# Altium PCB TRUMAN_PCB.PcbDoc (part 3 of 5)
Units mil, origin at the board's own origin, x right, y up, seen from the top; angles counter-clockwise.
Board outline 8050 x 5340 mil, 2 copper layers (Top Layer, Bottom Layer); 272 components, 210 nets, 840 pads, 280 vias.
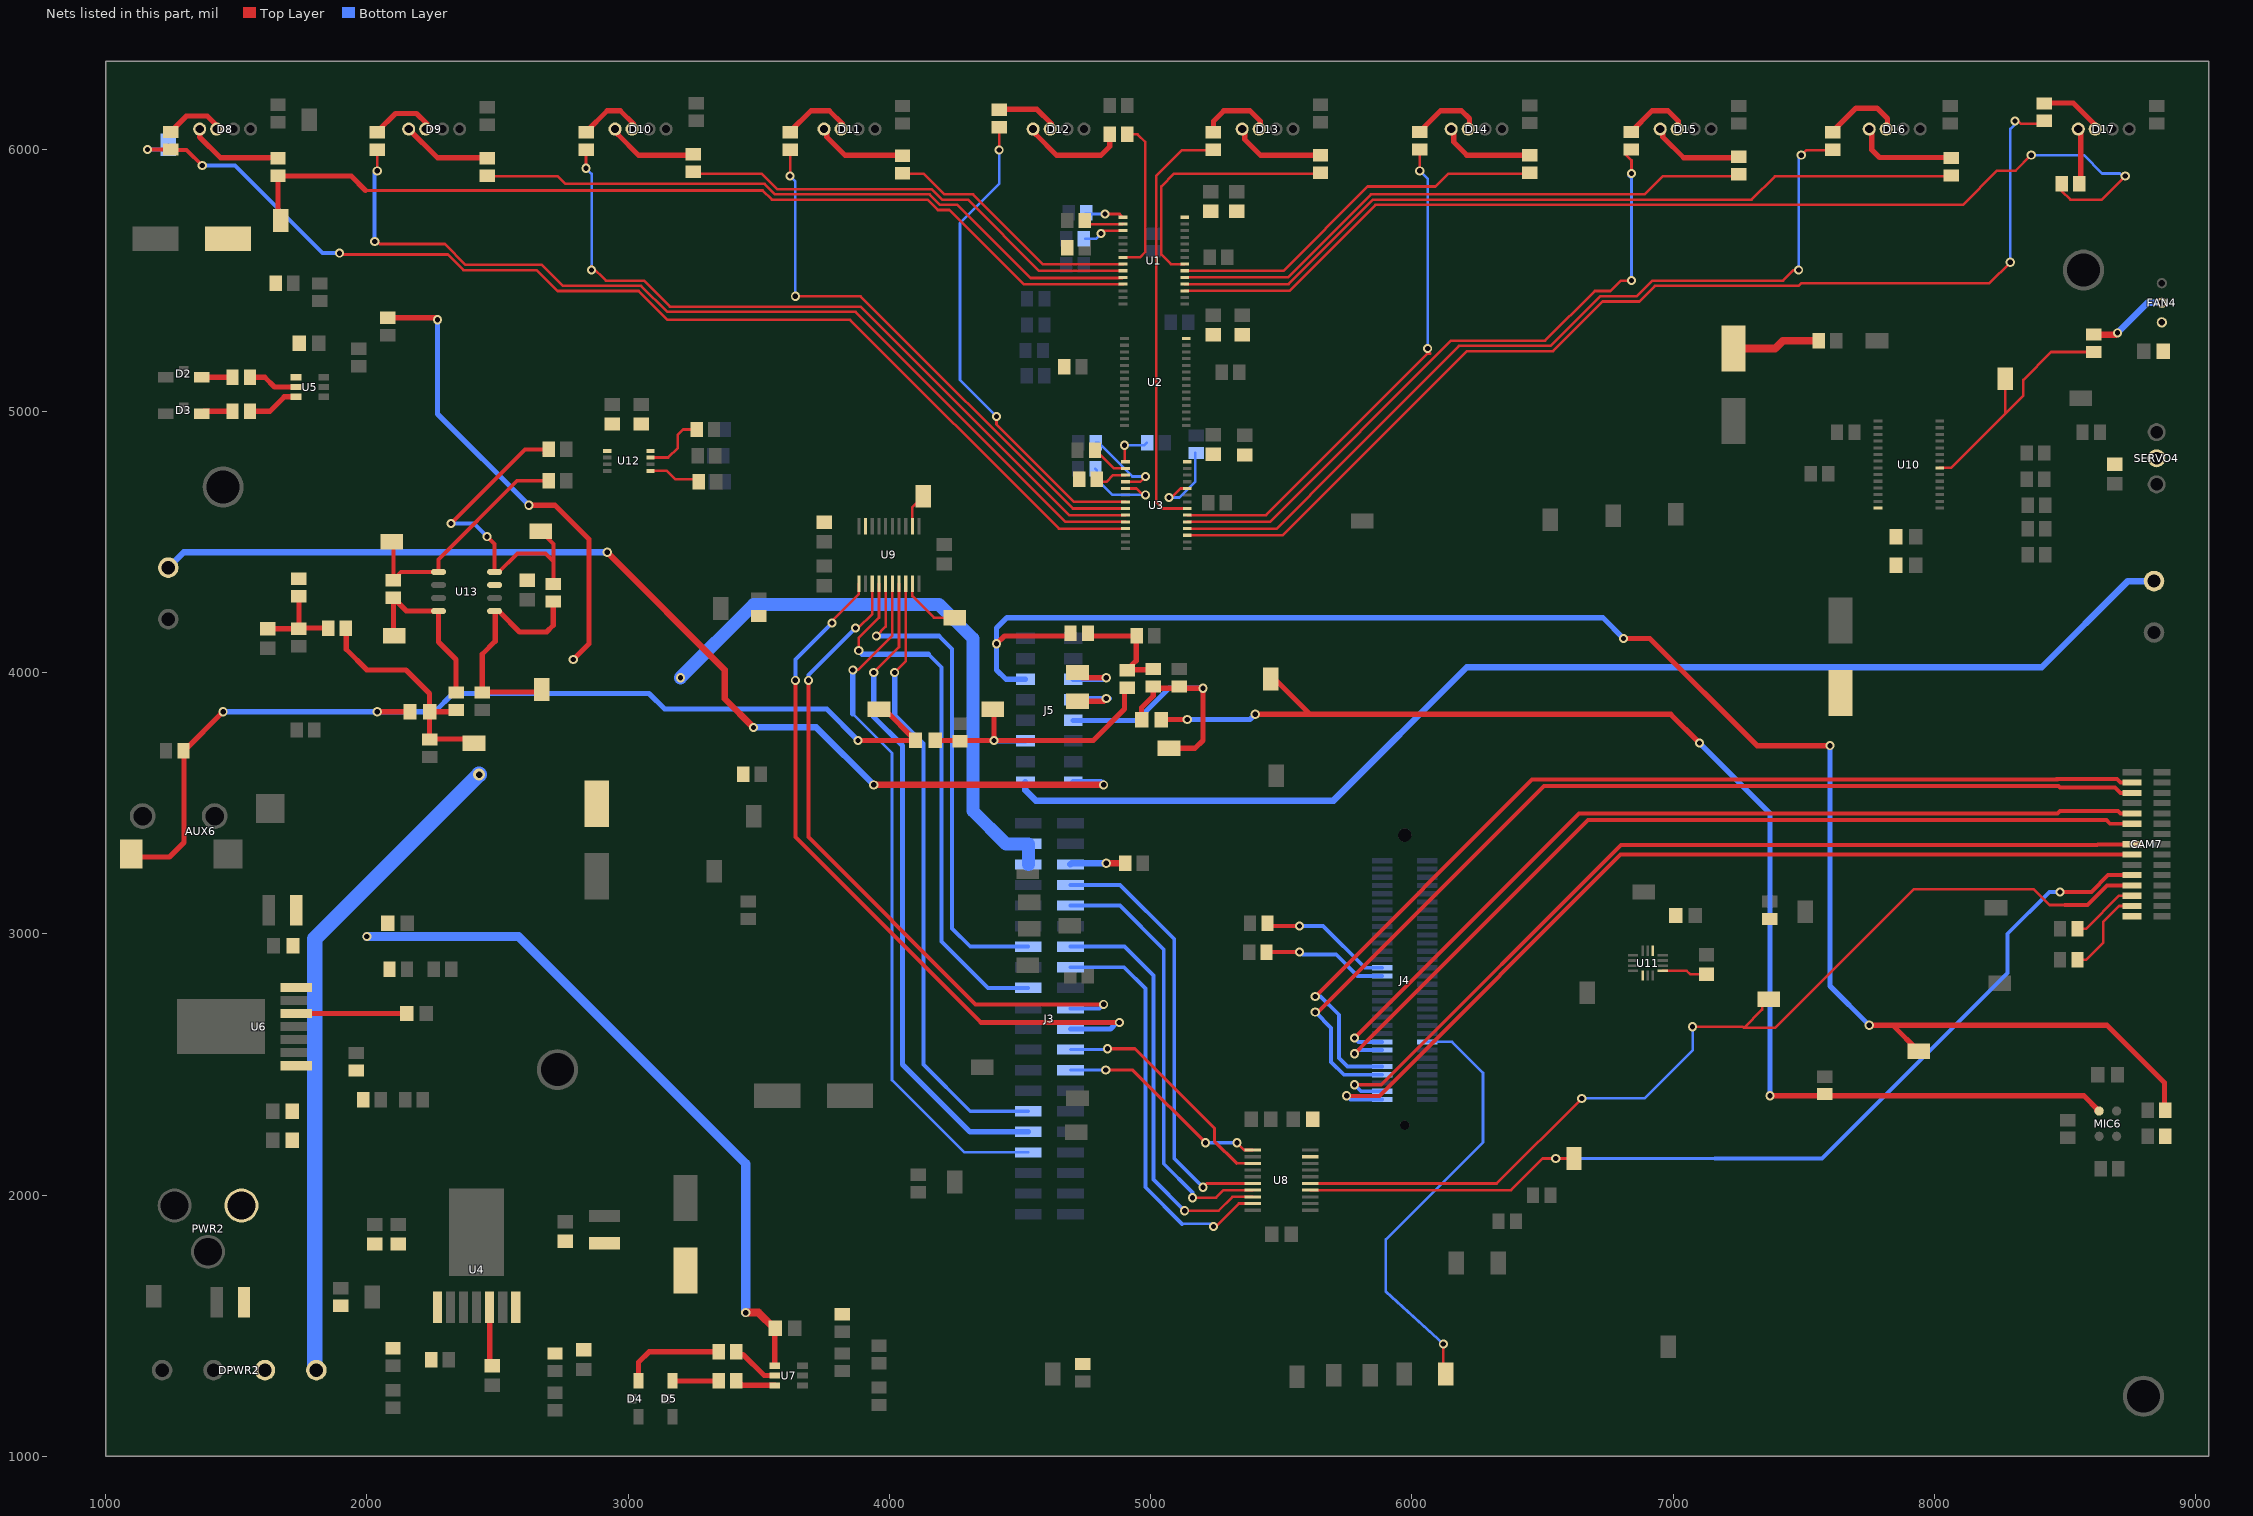
[diagram p2: the nets of this part, all layers, seen from the top]

## Part data (continued)
R29 R65: "RES SMD 2K OHM 5% 1/8W 0805", Case/Package=0805, Case Code (Metric)=2012, Manufacturer=Yageo, Manufacturer Part Number=RC0805JR-072KL, Max Operating Temperature=155°C, Max Power Dissipation=125mW, Min Operating Temperature=-55°C, Package Quantity=1, Resistance=2KR, Supplier Part Number 1=311-2.0KARCT-ND, Temperature Coefficient=100ppm/°C, Tolerance=5%, Voltage Rating=150V, =2K, Case Code (Imperial)=0805, ComponentLink1Description=https://datasheet.ciiva.com/46395/444164-46395141.pdf, ComponentLink1URL=https://datasheet.ciiva.com/46395/444164-46395141.pdf, ComponentLink2Description=https://datasheet.ciiva.com/2456/pyu-r-int-thick-7-2456104.pdf, ComponentLink2URL=https://datasheet.ciiva.com/2456/pyu-r-int-thick-7-2456104.pdf, ComponentLink3Description=https://datasheet.ciiva.com/2456/pyu-r-int-thick-7-2456105.pdf, ComponentLink3URL=https://datasheet.ciiva.com/2456/pyu-r-int-thick-7-2456105.pdf, ComponentLink4Description=https://datasheet.ciiva.com/2456/pyu-r-int-thick-7-2456106.pdf, ComponentLink4URL=https://datasheet.ciiva.com/2456/pyu-r-int-thick-7-2456106.pdf, ComponentLink5Description=https://datasheet.ciiva.com/12666/rc0805-12666941.pdf, ComponentLink5URL=https://datasheet.ciiva.com/12666/rc0805-12666941.pdf, Composition="Thick Film", Contact Plating=Tin,Lead,Matte, Depth=1.25mm, Height=0.024inch, Lead Free="Lead Free", Length=2mm, Military Standard=Not, Number of Pins=2, Number of Terminations=2, Packaging="Tape and Reel", Power Rating=125mW, Pricing 1="1=0.1, 10=0.016, 25=0.0116, 50=0.009, 100=0.0066, 250=0.005, 500=0.004, 1000=0.003 (USD)", Radiation Hardening=No, REACH SVHC="No SVHC", Stock 1=297667, Supplier 1=Digi-Key, Termination=SMD/SMT, Voltage Rating (DC)=150V, Width=0.049inch
R30 R40: "RESISTOR, THICK FILM, 23.2KOHM, 125mW, ± 1%", Case/Package=0805, Case Code (Metric)=2012, Manufacturer="Panasonic ECG", Manufacturer Part Number=ERJ-6ENF2322V, Max Operating Temperature=155°C, Max Power Dissipation=125mW, Min Operating Temperature=-55°C, Package Quantity=1, Resistance=23.2KR, Supplier Part Number 1=P23.2KCCT-ND, Temperature Coefficient=100ppm/°C, Tolerance=1%, Voltage Rating=150V, =23.2K, Case Code (Imperial)=0805, ComponentLink1Description=https://datasheet.ciiva.com/16766/70260748-16766008.pdf, ComponentLink1URL=https://datasheet.ciiva.com/16766/70260748-16766008.pdf, ComponentLink2Description=https://datasheet.ciiva.com/16770/70260748-16770232.pdf, ComponentLink2URL=https://datasheet.ciiva.com/16770/70260748-16770232.pdf, ComponentLink3Description=https://datasheet.ciiva.com/24026/aoa0000ce2-24026235.pdf, ComponentLink3URL=https://datasheet.ciiva.com/24026/aoa0000ce2-24026235.pdf, ComponentLink4Description=https://datasheet.ciiva.com/15829/aoa0000ce2-15829836.pdf, ComponentLink4URL=https://datasheet.ciiva.com/15829/aoa0000ce2-15829836.pdf, ComponentLink5Description=https://datasheet.ciiva.com/30086/aoa0000ce2-30086557.pdf, ComponentLink5URL=https://datasheet.ciiva.com/30086/aoa0000ce2-30086557.pdf, ComponentLink6Description=https://datasheet.ciiva.com/28548/1694929-28548334.pdf, ComponentLink6URL=https://datasheet.ciiva.com/28548/1694929-28548334.pdf, ComponentLink7Description=https://datasheet.ciiva.com/7870/aoa0000ce2-7870831.pdf, ComponentLink7URL=https://datasheet.ciiva.com/7870/aoa0000ce2-7870831.pdf, Composition="Thick Film", Contact Plating=Tin, Depth=1.25mm, Height=0.6mm, Lead Free="Lead Free", Length=2mm, Military Standard=Not, Mount="Surface Mount", Number of Terminations=2, Packaging="Tape and Reel", Power Rating=125mW, Pricing 1="1=0.1, 10=0.041, 100=0.0167, 1000=0.0075, 2500=0.0065 (USD)", REACH SVHC=Unknown, Stock 1=76814, Supplier 1=Digi-Key, Termination=Solder, Voltage Rating (DC)=150V, Width=0.049inch
R31: library part RES_0805_63.4K, "RES SMD 63.4K OHM 1% 1/8W 0805", Case/Package=0805, Case Code (Metric)=2012, Manufacturer=Yageo, Manufacturer Part Number=RC0805FR-0763K4L, Max Operating Temperature=155°C, Max Power Dissipation=125mW, Min Operating Temperature=-55°C, Package Quantity=1, Resistance=63.4KR, Supplier Part Number 1=311-63.4KCRCT-ND, Temperature Coefficient=100ppm/°C, Tolerance=1%, Voltage Rating=150V, =63.4K, Case Code (Imperial)=0805, ComponentLink1Description=https://datasheet.ciiva.com/2519/pyu-r-int-thick-7-2519699.pdf, ComponentLink1URL=https://datasheet.ciiva.com/2519/pyu-r-int-thick-7-2519699.pdf, ComponentLink2Description=https://datasheet.ciiva.com/2519/pyu-r-int-thick-7-2519700.pdf, ComponentLink2URL=https://datasheet.ciiva.com/2519/pyu-r-int-thick-7-2519700.pdf, ComponentLink3Description=https://datasheet.ciiva.com/2519/pyu-r-int-thick-7-2519701.pdf, ComponentLink3URL=https://datasheet.ciiva.com/2519/pyu-r-int-thick-7-2519701.pdf, Composition="Thick Film", Contact Plating=Tin,Matte, Depth=1.25mm, Height=0.024inch, Lead Free="Lead Free", Length=2mm, Military Standard=Not, Number of Terminations=2, Packaging="Tape and Reel", Power Rating=125mW, Pricing 1="1=0.1, 10=0.021, 25=0.0152, 100=0.0084, 250=0.0064, 500=0.0051, 1000=0.0038, 2500=0.0033 (USD)", Radiation Hardening=No, Stock 1=27, Supplier 1=Digi-Key, Termination=SMD/SMT, Voltage Rating (DC)=150V, Width=0.049inch
R32: "Res Thick Film 0805 226K Ohm 1% 1/8W ±100ppm/C Molded SMD Punched Carrier T/R", Case/Package=0805, Case Code (Metric)=2012, Manufacturer="Panasonic ECG", Manufacturer Part Number=ERJ-6ENF2263V, Max Operating Temperature=155°C, Max Power Dissipation=125mW, Min Operating Temperature=-55°C, Package Quantity=5000, Resistance=226KR, Supplier Part Number 1=P226KCCT-ND, Temperature Coefficient=100ppm/°C, Tolerance=1%, Voltage Rating=150V, =226K, Case Code (Imperial)=0805, ComponentLink1Description=https://datasheet.ciiva.com/22673/1678782-22673814.pdf, ComponentLink1URL=https://datasheet.ciiva.com/22673/1678782-22673814.pdf, ComponentLink2Description=https://datasheet.ciiva.com/30142/aoa0000ce2-30142390.pdf, ComponentLink2URL=https://datasheet.ciiva.com/30142/aoa0000ce2-30142390.pdf, ComponentLink3Description=https://datasheet.ciiva.com/22743/1678782-22743915.pdf, ComponentLink3URL=https://datasheet.ciiva.com/22743/1678782-22743915.pdf, ComponentLink4Description=https://datasheet.ciiva.com/22722/1678782-22722140.pdf, ComponentLink4URL=https://datasheet.ciiva.com/22722/1678782-22722140.pdf, ComponentLink5Description=https://datasheet.ciiva.com/46375/1678782-46375549.pdf, ComponentLink5URL=https://datasheet.ciiva.com/46375/1678782-46375549.pdf, ComponentLink6Description=https://datasheet.ciiva.com/46375/1678782-46375550.pdf, ComponentLink6URL=https://datasheet.ciiva.com/46375/1678782-46375550.pdf, ComponentLink7Description=https://datasheet.ciiva.com/9184/aoa0000ce2-9184239.pdf, ComponentLink7URL=https://datasheet.ciiva.com/9184/aoa0000ce2-9184239.pdf, Composition="Thick Film", Contact Plating=Tin, Depth=1.25mm, Height=0.028inch, Lead Free="Lead Free", Length=2mm, Military Standard=Not, Mount="Surface Mount", Number of Terminations=2, Packaging="Tape and Reel", Power Rating=125mW, Pricing 1="1=0.1, 10=0.041, 100=0.0167, 1000=0.0075, 2500=0.0065 (USD)", REACH SVHC="No SVHC", Stock 1=16885, Supplier 1=Digi-Key, Voltage Rating (DC)=150V, Width=0.049inch
R33: library part RES_0805_549K, "RES SMD 549K OHM 1% 1/8W 0805", Case/Package=0805, Case Code (Metric)=2012, Manufacturer=Vishay, Manufacturer Part Number=CRCW0805549KFKEA, Max Operating Temperature=155°C, Max Power Dissipation=125mW, Min Operating Temperature=-55°C, Package Quantity=10, Resistance=549KR, Supplier Part Number 1=541-549KCCT-ND, Temperature Coefficient=100ppm/°C, Tolerance=1%, Voltage Rating=150V, =549K, Case Code (Imperial)=0805, ComponentLink1Description=https://datasheet.ciiva.com/7670/1697337-7670905.pdf, ComponentLink1URL=https://datasheet.ciiva.com/7670/1697337-7670905.pdf, ComponentLink2Description=https://datasheet.ciiva.com/7670/1697337-7670906.pdf, ComponentLink2URL=https://datasheet.ciiva.com/7670/1697337-7670906.pdf, ComponentLink3Description=https://datasheet.ciiva.com/8929/dcrcwe3-8929562.pdf, ComponentLink3URL=https://datasheet.ciiva.com/8929/dcrcwe3-8929562.pdf, ComponentLink4Description=https://datasheet.ciiva.com/2467/dcrcwe3-2467947.pdf, ComponentLink4URL=https://datasheet.ciiva.com/2467/dcrcwe3-2467947.pdf, ComponentLink5Description=https://datasheet.ciiva.com/2467/dcrcwe3-2467948.pdf, ComponentLink5URL=https://datasheet.ciiva.com/2467/dcrcwe3-2467948.pdf, ComponentLink6Description=https://datasheet.ciiva.com/2467/dcrcwe3-2467949.pdf, ComponentLink6URL=https://datasheet.ciiva.com/2467/dcrcwe3-2467949.pdf, ComponentLink7Description=https://datasheet.ciiva.com/7726/66915-7726014.pdf, ComponentLink7URL=https://datasheet.ciiva.com/7726/66915-7726014.pdf, ComponentLink8Description=https://datasheet.ciiva.com/8929/dcrcwe3-8929566.pdf, ComponentLink8URL=https://datasheet.ciiva.com/8929/dcrcwe3-8929566.pdf, ComponentLink9Description=https://datasheet.ciiva.com/16392/dcrcwe3-16392334.pdf, ComponentLink9URL=https://datasheet.ciiva.com/16392/dcrcwe3-16392334.pdf, ComponentLink10Description=https://datasheet.ciiva.com/22683/1847332-22683326.pdf, ComponentLink10URL=https://datasheet.ciiva.com/22683/1847332-22683326.pdf, Composition="Thick Film", Contact Plating=Tin, Depth=1.25mm, Height=0.02inch, Lead Free="Lead Free", Length=2mm, Military Standard=Not, Number of Pins=2, Number of Terminations=2, Packaging="Tape and Reel", Power Rating=125mW, Pricing 1="1=0.1, 10=0.046, 100=0.0187, 1000=0.0084, 2500=0.0073 (USD)", Radiation Hardening=No, REACH SVHC=Unknown, Stock 1=25548, Supplier 1=Digi-Key, Voltage Rating (DC)=150V, Weight=0.000194oz, Width=1.25mm
R34 R43: "RES SMD 11.8K OHM 1% 1/8W 0805", Case/Package=0805, Case Code (Metric)=2012, Manufacturer=Yageo, Manufacturer Part Number=RC0805FR-0711K8L, Max Operating Temperature=155°C, Max Power Dissipation=125mW, Min Operating Temperature=-55°C, Package Quantity=1, Resistance=11.8KR, Supplier Part Number 1=311-11.8KCRCT-ND, Temperature Coefficient=100ppm/°C, Tolerance=1%, Voltage Rating=150V, =11.8K, Case Code (Imperial)=0805, ComponentLink1Description=https://datasheet.ciiva.com/15189/getdatasheetpartid-498796-15189893.pdf, ComponentLink1URL=https://datasheet.ciiva.com/15189/getdatasheetpartid-498796-15189893.pdf, ComponentLink2Description=https://datasheet.ciiva.com/2509/pyu-r-int-thick-7-2509453.pdf, ComponentLink2URL=https://datasheet.ciiva.com/2509/pyu-r-int-thick-7-2509453.pdf, ComponentLink3Description=https://datasheet.ciiva.com/2509/pyu-r-int-thick-7-2509454.pdf, ComponentLink3URL=https://datasheet.ciiva.com/2509/pyu-r-int-thick-7-2509454.pdf, ComponentLink4Description=https://datasheet.ciiva.com/2509/pyu-r-int-thick-7-2509455.pdf, ComponentLink4URL=https://datasheet.ciiva.com/2509/pyu-r-int-thick-7-2509455.pdf, Composition="Thick Film", Contact Plating=Tin,Lead,Matte, Depth=1.25mm, Height=0.024inch, Lead Free="Lead Free", Length=2mm, Military Standard=Not, Number of Terminations=2, Packaging="Tape and Reel", Power Rating=125mW, Pricing 1="1=0.1, 10=0.022, 100=0.0088, 1000=0.004, 2500=0.0034 (USD)", Radiation Hardening=No, Stock 1=69614, Supplier 1=Digi-Key, Termination=SMD/SMT, Voltage Rating (DC)=150V, Width=0.049inch
R35 R36 R46 R48: library part RES_0805_787, "RES SMD 787 OHM 1% 1/8W 0805", Case/Package=0805, Case Code (Metric)=2012, Manufacturer=Yageo, Manufacturer Part Number=RC0805FR-07787RL, Max Operating Temperature=155°C, Max Power Dissipation=125mW, Min Operating Temperature=-55°C, Package Quantity=1, Resistance=787R, Supplier Part Number 1=311-787CRCT-ND, Temperature Coefficient=100ppm/°C, Tolerance=1%, Voltage Rating=150V, =787, Case Code (Imperial)=0805, ComponentLink1Description=https://datasheet.ciiva.com/2457/pyu-r-int-thick-7-2457920.pdf, ComponentLink1URL=https://datasheet.ciiva.com/2457/pyu-r-int-thick-7-2457920.pdf, ComponentLink2Description=https://datasheet.ciiva.com/2457/pyu-r-int-thick-7-2457921.pdf, ComponentLink2URL=https://datasheet.ciiva.com/2457/pyu-r-int-thick-7-2457921.pdf, ComponentLink3Description=https://datasheet.ciiva.com/2457/pyu-r-int-thick-7-2457922.pdf, ComponentLink3URL=https://datasheet.ciiva.com/2457/pyu-r-int-thick-7-2457922.pdf, ComponentLink4Description=https://datasheet.ciiva.com/12656/rc0805-12656894.pdf, ComponentLink4URL=https://datasheet.ciiva.com/12656/rc0805-12656894.pdf, Composition="Thick Film", Depth=1.25mm, Height=0.024inch, Lead Free="Lead Free", Length=0.079inch, Military Standard=Not, Number of Terminations=2, Packaging="Tape and Reel", Power Rating=125mW, Pricing 1="1=0.1, 10=0.022, 100=0.0088, 1000=0.004, 2500=0.0034 (USD)", Stock 1=69458, Supplier 1=Digi-Key, Termination=SMD/SMT, Voltage Rating (DC)=150V, Width=0.049inch
R38: library part RES_0805_5.23K, "Thick Film Resistors 5.23K OHM 1%", Case/Package=0805, Case Code (Metric)=2012, Manufacturer=Yageo, Manufacturer Part Number=RC0805FR-075K23L, Max Operating Temperature=155°C, Min Operating Temperature=-55°C, Power Rating=125mW, Resistance=5.23KR, Supplier Part Number 1=311-5.23KCRCT-ND, Temperature Coefficient=100ppm/°C, Tolerance=1%, Voltage Rating=150V, =5.23K, Case Code (Imperial)=0805, ComponentLink1Description=https://datasheet.ciiva.com/12577/rc0805-12577289.pdf, ComponentLink1URL=https://datasheet.ciiva.com/12577/rc0805-12577289.pdf, Composition="Thick Film", Contact Plating=Tin,Matte, Depth=1.25mm, Height=0.5mm, Lead Free="Lead Free", Length=2mm, Military Standard=Not, Packaging="Tape and Reel", Pricing 1="1=0.1, 10=0.022, 100=0.0088, 1000=0.004, 2500=0.0034 (USD)", Radiation Hardening=No, Stock 1=101854, Supplier 1=Digi-Key, Termination=SMD/SMT, Voltage Rating (DC)=150V, Weight=0.000194oz, Width=1.25mm
R41 R120 R121 R122 R123: "Res Thick Film 0805 100K Ohm 1% 0.125W(1/8W) ±100ppm/C Molded SMD Automotive Punched T/R", Case/Package=0805, Case Code (Metric)=2012, Manufacturer="Panasonic ECG", Manufacturer Part Number=ERJ-6ENF1003V, Max Operating Temperature=155°C, Max Power Dissipation=125mW, Min Operating Temperature=-55°C, Package Quantity=1, Resistance=100KR, Supplier Part Number 1=P100KCCT-ND, Temperature Coefficient=100ppm/°C, Tolerance=1%, Voltage Rating=150V, =100K, Case Code (Imperial)=0805, ComponentLink1Description=https://datasheet.ciiva.com/11821/0900766b80f80784-11821507.pdf, ComponentLink1URL=https://datasheet.ciiva.com/11821/0900766b80f80784-11821507.pdf, ComponentLink2Description=https://datasheet.ciiva.com/22723/426256-22723909.pdf, ComponentLink2URL=https://datasheet.ciiva.com/22723/426256-22723909.pdf, ComponentLink3Description=https://datasheet.ciiva.com/46419/1678782-46419877.pdf, ComponentLink3URL=https://datasheet.ciiva.com/46419/1678782-46419877.pdf, ComponentLink4Description=https://datasheet.ciiva.com/27055/1988989-27055734.pdf, ComponentLink4URL=https://datasheet.ciiva.com/27055/1988989-27055734.pdf, ComponentLink5Description=https://datasheet.ciiva.com/16449/aoa0000ce2-16449480.pdf, ComponentLink5URL=https://datasheet.ciiva.com/16449/aoa0000ce2-16449480.pdf, ComponentLink6Description=https://datasheet.ciiva.com/17208/aoa0000ce2-17208153.pdf, ComponentLink6URL=https://datasheet.ciiva.com/17208/aoa0000ce2-17208153.pdf, ComponentLink7Description=https://datasheet.ciiva.com/22667/1678782-22667897.pdf, ComponentLink7URL=https://datasheet.ciiva.com/22667/1678782-22667897.pdf, ComponentLink8Description=https://datasheet.ciiva.com/24023/aoa0000ce2-24023497.pdf, ComponentLink8URL=https://datasheet.ciiva.com/24023/aoa0000ce2-24023497.pdf, ComponentLink9Description=https://datasheet.ciiva.com/7830/426256-7830746.pdf, ComponentLink9URL=https://datasheet.ciiva.com/7830/426256-7830746.pdf, ComponentLink10Description=https://datasheet.ciiva.com/30257/aoa0000ce2-30257690.pdf, ComponentLink10URL=https://datasheet.ciiva.com/30257/aoa0000ce2-30257690.pdf, ComponentLink11Description=https://datasheet.ciiva.com/7830/426256-7830988.pdf, ComponentLink11URL=https://datasheet.ciiva.com/7830/426256-7830988.pdf, ComponentLink12Description=https://datasheet.ciiva.com/16776/70260748-16776892.pdf, ComponentLink12URL=https://datasheet.ciiva.com/16776/70260748-16776892.pdf, ComponentLink13Description=https://datasheet.ciiva.com/16788/70260748-16788734.pdf, ComponentLink13URL=https://datasheet.ciiva.com/16788/70260748-16788734.pdf, ComponentLink14Description=https://datasheet.ciiva.com/48531/aoa0000ce2-48531486.pdf, ComponentLink14URL=https://datasheet.ciiva.com/48531/aoa0000ce2-48531486.pdf, Composition="Thick Film", Contact Plating=Tin, Depth=1.25mm, Height=0.6mm, Lead Free="Lead Free", Length=2mm, Military Standard=Not, Mount="Surface Mount", Number of Pins=2, Number of Terminations=2, Packaging="Tape and Reel", Power Rating=125mW, Pricing 1="1=0.1, 10=0.041, 100=0.0167, 1000=0.0075, 2500=0.0065 (USD)", Radiation Hardening=No, REACH SVHC="No SVHC", Stock 1=219769, Supplier 1=Digi-Key, Termination=SMD/SMT, Voltage Rating (DC)=150V, Width=0.049inch
R42: library part RES_0805_1.13M, "Res Thick Film 0805 1.13M Ohm 1% 1/8W 100ppm/C Molded SMD Punched Carrier T/R", Case/Package=0805, Case Code (Metric)=2012, Manufacturer=Panasonic, Manufacturer Part Number=ERJ-6ENF1134V, Max Operating Temperature=155°C, Max Power Dissipation=125mW, Min Operating Temperature=-55°C, Package Quantity=5000, Resistance=1.13MR, Supplier Part Number 1=P1.13BTCT-ND, Temperature Coefficient=100ppm/°C, Tolerance=1%, Voltage Rating=150V, =1.13M, Case Code (Imperial)=0805, ComponentLink1Description=https://datasheet.ciiva.com/46446/1678782-46446917.pdf, ComponentLink1URL=https://datasheet.ciiva.com/46446/1678782-46446917.pdf, ComponentLink2Description=https://datasheet.ciiva.com/24066/aoa0000ce2-24066135.pdf, ComponentLink2URL=https://datasheet.ciiva.com/24066/aoa0000ce2-24066135.pdf, ComponentLink3Description=https://datasheet.ciiva.com/9198/aoa0000ce2-9198600.pdf, ComponentLink3URL=https://datasheet.ciiva.com/9198/aoa0000ce2-9198600.pdf, ComponentLink4Description=https://datasheet.ciiva.com/22757/1678782-22757053.pdf, ComponentLink4URL=https://datasheet.ciiva.com/22757/1678782-22757053.pdf, ComponentLink5Description=https://datasheet.ciiva.com/22743/1678782-22743119.pdf, ComponentLink5URL=https://datasheet.ciiva.com/22743/1678782-22743119.pdf, Composition="Thick Film", Contact Plating=Tin, Height=0.028inch, Lead Free="Lead Free", Length=0.079inch, Mount="Surface Mount", Number of Terminations=2, Packaging="Tape and Reel", Power Rating=125mW, Pricing 1="1=0.1, 10=0.041, 100=0.0167, 1000=0.0075, 2500=0.0065 (USD)", REACH SVHC="No SVHC", Stock 1=8396, Supplier 1=Digi-Key, Termination=SMD/SMT, Voltage Rating (DC)=150V, Width=0.049inch
R44: "RES SMD 255K OHM 1% 1/8W 0805", Case/Package=0805, Case Code (Metric)=2012, Manufacturer=Yageo, Manufacturer Part Number=RC0805FR-07255KL, Max Operating Temperature=155°C, Max Power Dissipation=125mW, Min Operating Temperature=-55°C, Package Quantity=1, Resistance=255KR, Supplier Part Number 1=311-255KCRCT-ND, Temperature Coefficient=100ppm/°C, Tolerance=1%, Voltage Rating=150V, =255K, Case Code (Imperial)=0805, ComponentLink1Description=https://datasheet.ciiva.com/12560/rc0805-257173-12560696.pdf, ComponentLink1URL=https://datasheet.ciiva.com/12560/rc0805-257173-12560696.pdf, ComponentLink2Description=https://datasheet.ciiva.com/2457/pyu-r-int-thick-7-2457386.pdf, ComponentLink2URL=https://datasheet.ciiva.com/2457/pyu-r-int-thick-7-2457386.pdf, ComponentLink3Description=https://datasheet.ciiva.com/2457/pyu-r-int-thick-7-2457387.pdf, ComponentLink3URL=https://datasheet.ciiva.com/2457/pyu-r-int-thick-7-2457387.pdf, ComponentLink4Description=https://datasheet.ciiva.com/2457/pyu-r-int-thick-7-2457388.pdf, ComponentLink4URL=https://datasheet.ciiva.com/2457/pyu-r-int-thick-7-2457388.pdf, ComponentLink5Description=https://datasheet.ciiva.com/17419/rc0805-17419887.pdf, ComponentLink5URL=https://datasheet.ciiva.com/17419/rc0805-17419887.pdf, Composition="Thick Film", Depth=1.25mm, Height=0.024inch, Lead Free="Lead Free", Length=2mm, Military Standard=Not, Number of Terminations=2, Packaging="Tape and Reel", Power Rating=125mW, Pricing 1="1=0.1, 10=0.022, 100=0.0088, 1000=0.004, 2500=0.0034 (USD)", Stock 1=81508, Supplier 1=Digi-Key, Termination=SMD/SMT, Voltage Rating (DC)=150V, Width=1.25mm
R45: library part RES_0805_887K, "Thick Film Resistors - SMD 887K OHM 1%", Case/Package=0805, Case Code (Metric)=2012, Manufacturer=Yageo, Manufacturer Part Number=RC0805FR-07887KL, Max Operating Temperature=155°C, Min Operating Temperature=-55°C, Power Rating=125mW, Resistance=887KR, Supplier Part Number 1=311-887KCRCT-ND, Temperature Coefficient=100ppm/°C, Tolerance=1%, Voltage Rating=150V, =887K, Case Code (Imperial)=0805, ComponentLink1Description=http://components.arrow.com/part/dataview/0323_03541583, ComponentLink1URL=http://components.arrow.com/part/dataview/0323_03541583, ComponentLink2Description=http://www.yageo.ru/pdf/RC0805.pdf, ComponentLink2URL=http://www.yageo.ru/pdf/RC0805.pdf, ComponentLink3Description=http://www.yageo.com/documents/recent/PYu-RC_Group_51_RoHS_L_2.pdf, ComponentLink3URL=http://www.yageo.com/documents/recent/PYu-RC_Group_51_RoHS_L_2.pdf, ComponentLink4Description=http://www.yageo.com/documents/recent/PYu-RC0805_51_RoHS_L_5.pdf, ComponentLink4URL=http://www.yageo.com/documents/recent/PYu-RC0805_51_RoHS_L_5.pdf, Composition="Thick Film", Contact Plating=Tin,Matte, Depth=1.25mm, Height=0.5mm, Lead Free="Lead Free", Length=2mm, Military Standard=Not, Packaging="Tape and Reel", Pricing 1="1=0.1, 10=0.022, 100=0.0088, 1000=0.004, 2500=0.0034 (USD)", Radiation Hardening=No, Stock 1=29855, Supplier 1=Digi-Key, Termination=SMD/SMT, Voltage Rating (DC)=150V, Width=1.25mm
R50 R51 R55 R56 R71 R74 R76 R77 R81 R84 R85 R86 R87 R88 R89: "RES, THICK FILM, 0R, 0.125W, 0805", Case/Package=0805, Case Code (Metric)=2012, Manufacturer=Yageo, Manufacturer Part Number=RC0805JR-070RL, Max Operating Temperature=155°C, Min Operating Temperature=-55°C, Power Rating=125mW, Resistance=0mR, Supplier Part Number 1=311-0.0ARCT-ND, Temperature Coefficient=200ppm/°C, Tolerance=5%, Voltage Rating=150V, =0, Case Code (Imperial)=0805, ComponentLink1Description=https://datasheet.ciiva.com/7941/1738694-7941861.pdf, ComponentLink1URL=https://datasheet.ciiva.com/7941/1738694-7941861.pdf, ComponentLink2Description=https://datasheet.ciiva.com/7941/1738694-7941862.pdf, ComponentLink2URL=https://datasheet.ciiva.com/7941/1738694-7941862.pdf, ComponentLink3Description=https://datasheet.ciiva.com/11819/0900766b8106beab-11819430.pdf, ComponentLink3URL=https://datasheet.ciiva.com/11819/0900766b8106beab-11819430.pdf, ComponentLink4Description=https://datasheet.ciiva.com/7941/1738694-7941863.pdf, ComponentLink4URL=https://datasheet.ciiva.com/7941/1738694-7941863.pdf, ComponentLink5Description=https://datasheet.ciiva.com/15190/getdatasheetpartid-330685-15190028.pdf, ComponentLink5URL=https://datasheet.ciiva.com/15190/getdatasheetpartid-330685-15190028.pdf, Composition="Thick Film", Contact Plating=Tin,Matte, Depth=1.25mm, Height=0.5mm, Lead Free="Lead Free", Length=2mm, Military Standard=Not, Number of Pins=2, Packaging="Tape and Reel", Pricing 1="1=0.1, 10=0.018, 25=0.0128, 50=0.0096, 100=0.0071, 250=0.0054, 500=0.0044, 1000=0.0032 (USD)", Radiation Hardening=No, REACH SVHC=Unknown, Stock 1=6469744, Supplier 1=Digi-Key, Termination=SMD/SMT, Voltage Rating (DC)=150V, Width=1.25mm
R72 R80: "Res Thick Film 0805 499 Ohm 1% 0.125W(1/8W) ±100ppm/C Molded SMD Automotive T/R", Case/Package=0805, Case Code (Metric)=2012, Manufacturer="Stackpole Electronics", Manufacturer Part Number=RMCF0805FT499R, Max Operating Temperature=155°C, Max Power Dissipation=125mW, Min Operating Temperature=-55°C, Resistance=499, Supplier Part Number 1=RMCF0805FT499RCT-ND, Temperature Coefficient=100ppm/°C, Tolerance=1%, Case Code (Imperial)=0805, ComponentLink1Description=https://www.verical.com/server-webapp/html/getDatasheet?partID=363156, ComponentLink1URL=https://www.verical.com/server-webapp/html/getDatasheet?partID=363156, ComponentLink2Description=http://components.arrow.com/part/dataview/44988387S7171819N1174, ComponentLink2URL=http://components.arrow.com/part/dataview/44988387S7171819N1174, ComponentLink3Description=https://www.seielect.com/catalog/SEI-RMCF_RMCP.pdf, ComponentLink3URL=https://www.seielect.com/catalog/SEI-RMCF_RMCP.pdf, ComponentLink4Description=http://www.seielect.com/Catalog/SEI-RMC.pdf, ComponentLink4URL=http://www.seielect.com/Catalog/SEI-RMC.pdf, Composition="Thick Film", Contact Plating=Tin,Matte, Depth=1.25mm, Height=0.026inch, Lead Free="Lead Free", Length=2mm, Military Standard=Not, Mount="Surface Mount", Number of Terminations=2, Packaging="Tape and Reel", Power Rating=125mW, Pricing 1="1=0.1, 10=0.023, 100=0.0095, 1000=0.0043, 2500=0.0037 (USD)", Radiation Hardening=No, Stock 1=258760, Supplier 1=Digi-Key, Width=0.049inch
R73 R82: "Res Thick Film 0805 1.2K Ohm 5% 0.125W(1/8W) ±200ppm/C Molded SMD Automotive T/R", Case/Package=0805, Case Code (Metric)=2012, Manufacturer="Stackpole Electronics", Manufacturer Part Number=RMCF0805JT1K20, Max Operating Temperature=155°C, Max Power Dissipation=125mW, Min Operating Temperature=-55°C, Resistance=1.2K, Supplier Part Number 1=RMCF0805JT1K20CT-ND, Temperature Coefficient=200ppm/°C, Tolerance=5%, Case Code (Imperial)=0805, ComponentLink1Description=https://www.verical.com/server-webapp/html/getDatasheet?partID=408272, ComponentLink1URL=https://www.verical.com/server-webapp/html/getDatasheet?partID=408272, ComponentLink2Description=http://components.arrow.com/part/dataview/50565311S7077410N1174, ComponentLink2URL=http://components.arrow.com/part/dataview/50565311S7077410N1174, ComponentLink3Description=https://www.seielect.com/catalog/SEI-RMCF_RMCP.pdf, ComponentLink3URL=https://www.seielect.com/catalog/SEI-RMCF_RMCP.pdf, Composition="Thick Film", Contact Plating=Tin,Matte, Depth=1.25mm, Height=0.026inch, Lead Free="Lead Free", Length=0.079inch, Military Standard=Not, Mount="Surface Mount", Number of Terminations=2, Packaging="Tape and Reel", Pricing 1="1=0.1, 10=0.017, 100=0.0067, 1000=0.003, 2500=0.0026 (USD)", Radiation Hardening=No, Stock 1=133190, Supplier 1=Digi-Key, Width=0.049inch
R78 R79: "RES SMD 49.9 OHM 1% 1/8W 0805", Case/Package=0805, Case Code (Metric)=2012, Manufacturer=Yageo, Manufacturer Part Number=RC0805FR-0749R9L, Max Operating Temperature=155°C, Max Power Dissipation=125mW, Min Operating Temperature=-55°C, Package Quantity=1, Resistance=49.9, Supplier Part Number 1=311-49.9CRCT-ND, Temperature Coefficient=100ppm/°C, Tolerance=1%, Voltage Rating=150V, Case Code (Imperial)=0805, ComponentLink1Description=https://datasheet.ciiva.com/11808/0900766b8106beab-11808260.pdf, ComponentLink1URL=https://datasheet.ciiva.com/11808/0900766b8106beab-11808260.pdf, ComponentLink2Description=https://datasheet.ciiva.com/12667/rc0805-12667333.pdf, ComponentLink2URL=https://datasheet.ciiva.com/12667/rc0805-12667333.pdf, ComponentLink3Description=https://datasheet.ciiva.com/17041/rc0805-17041420.pdf, ComponentLink3URL=https://datasheet.ciiva.com/17041/rc0805-17041420.pdf, Composition="Thick Film", Depth=1.25mm, Height=0.024inch, Lead Free="Lead Free", Length=2mm, Military Standard=Not, Mount="Surface Mount", Number of Terminations=2, Packaging="Tape and Reel", Power Rating=125mW, Pricing 1="1=0.1, 10=0.022, 100=0.0088, 1000=0.004, 2500=0.0034 (USD)", Stock 1=531225, Supplier 1=Digi-Key, Termination=SMD/SMT, Voltage Rating (DC)=150V, Width=0.049inch
R90 R91 R96 R97 R102 R103 R108 R109 R114 R117: "RES SMD 309 OHM 1% 1/8W 0805", Case/Package=0805, Case Code (Metric)=2012, Manufacturer=Yageo, Manufacturer Part Number=RC0805FR-07309RL, Max Operating Temperature=155°C, Max Power Dissipation=125mW, Min Operating Temperature=-55°C, Package Quantity=1, Resistance=309R, Supplier Part Number 1=311-309CRCT-ND, Temperature Coefficient=100ppm/°C, Tolerance=1%, Voltage Rating=150V, =309, Case Code (Imperial)=0805, ComponentLink1Description=https://datasheet.ciiva.com/2457/pyu-r-int-thick-7-2457593.pdf, ComponentLink1URL=https://datasheet.ciiva.com/2457/pyu-r-int-thick-7-2457593.pdf, ComponentLink2Description=https://datasheet.ciiva.com/2457/pyu-r-int-thick-7-2457594.pdf, ComponentLink2URL=https://datasheet.ciiva.com/2457/pyu-r-int-thick-7-2457594.pdf, ComponentLink3Description=https://datasheet.ciiva.com/2457/pyu-r-int-thick-7-2457595.pdf, ComponentLink3URL=https://datasheet.ciiva.com/2457/pyu-r-int-thick-7-2457595.pdf, Composition="Thick Film", Contact Plating=Tin,Lead,Matte, Depth=1.25mm, Height=0.024inch, Lead Free="Lead Free", Length=2mm, Military Standard=Not, Number of Terminations=2, Packaging="Tape and Reel", Power Rating=125mW, Pricing 1="1=0.1, 10=0.022, 100=0.0088, 1000=0.004, 2500=0.0034 (USD)", Radiation Hardening=No, Stock 1=22039, Supplier 1=Digi-Key, Termination=SMD/SMT, Voltage Rating (DC)=150V, Width=1.25mm
R92 R93 R94 R95 R98 R99 R100 R101 R104 R105 R106 R107 R110 R111 R112 R113 R115 R116 R118 R119: library part RES_0805_169, "RES SMD 169 OHM 1% 1/8W 0805", Case/Package=0805, Case Code (Metric)=2012, Manufacturer=Yageo, Manufacturer Part Number=RC0805FR-07169RL, Max Operating Temperature=155°C, Max Power Dissipation=125mW, Min Operating Temperature=-55°C, Package Quantity=1, Resistance=169R, Supplier Part Number 1=311-169CRCT-ND, Temperature Coefficient=100ppm/°C, Tolerance=1%, Voltage Rating=150V, =169, Case Code (Imperial)=0805, ComponentLink1Description=https://datasheet.ciiva.com/17054/rc0805-17054266.pdf, ComponentLink1URL=https://datasheet.ciiva.com/17054/rc0805-17054266.pdf, ComponentLink2Description=https://datasheet.ciiva.com/2509/pyu-r-int-thick-7-2509468.pdf, ComponentLink2URL=https://datasheet.ciiva.com/2509/pyu-r-int-thick-7-2509468.pdf, ComponentLink3Description=https://datasheet.ciiva.com/2509/pyu-r-int-thick-7-2509469.pdf, ComponentLink3URL=https://datasheet.ciiva.com/2509/pyu-r-int-thick-7-2509469.pdf, ComponentLink4Description=https://datasheet.ciiva.com/2509/pyu-r-int-thick-7-2509470.pdf, ComponentLink4URL=https://datasheet.ciiva.com/2509/pyu-r-int-thick-7-2509470.pdf, Composition="Thick Film", Contact Plating=Tin,Matte, Depth=1.25mm, Height=0.024inch, Lead Free="Lead Free", Length=2mm, Military Standard=Not, Number of Terminations=2, Packaging="Tape and Reel", Power Rating=125mW, Pricing 1="1=0.1, 10=0.022, 100=0.0088, 1000=0.004, 2500=0.0034 (USD)", Radiation Hardening=No, Stock 1=54311, Supplier 1=Digi-Key, Termination=SMD/SMT, Voltage Rating (DC)=150V, Width=0.049inch
SERVO4: library part Servo_Header, "Board-To-Board Connector, Vertical, WR-PHD Series, Through Hole, Header, 3 Contacts, 2.54 mm", Case/Package=100, Colour=Black, Manufacturer="Wurth Electronics", Supplier Part Number 1=900-00008-ND, ComponentLink1Description=http://www.farnell.com/cad/1737268.pdf, ComponentLink1URL=http://www.farnell.com/cad/1737268.pdf, Connector Type="Male Pin", Contact Material=Copper, Contact Mating Length=0.236inch, Contact Plating=Gold, Gender=Male, Lead Free="Lead Free", Manufacturer Part Number=61300311121, Mount="Through Hole", Number of Contacts=3, Number of Positions=3, Number of Rows=1, Packaging=Bulk, Pitch=0.1inch, Pricing 2="1=0.13, 10=0.106, 25=0.088, 50=0.074, 100=0.067, 1000=0.061 (USD)", REACH SVHC=Unknown, Stock 2=24543, Supplier 1=Digi-Key, Supplier 2=Digi-Key, Supplier Part Number 2=732-5316-ND, Termination=Solder
SPKR6 SPKR7: "4 Ohm Magnetic Speaker 2W 20Hz ~ 20kHz Top Rectangular 93dB", Colour=Green, Current=18A, Current Rating=16A, Flammability Rating="UL94 V-0", Manufacturer=CUI, Max Power Dissipation=2.5W, Max Supply Voltage=250V, Package Quantity=250, Power Rating=2W, Supplier Part Number 1=102-3547-ND, Voltage=300V, Voltage Rating (DC)=320V, Approvals=UL, ComponentLink1Description=https://datasheet.ciiva.com/824/combiconcompact5-0mmseries-824222.pdf, ComponentLink1URL=https://datasheet.ciiva.com/824/combiconcompact5-0mmseries-824222.pdf, ComponentLink2Description=https://datasheet.ciiva.com/15169/getdatasheetpartid-177903-15169663.pdf, ComponentLink2URL=https://datasheet.ciiva.com/15169/getdatasheetpartid-177903-15169663.pdf, ComponentLink3Description=https://datasheet.ciiva.com/16047/1935161-16047247.pdf, ComponentLink3URL=https://datasheet.ciiva.com/16047/1935161-16047247.pdf, Connector Type=Screw, Depth=9mm, Height=6.1mm, Housing Colour=Green, Housing Material=Polyamide, Impedance=4R, Insulation Material=Nylon, Lead Free="Lead Free", Length=27mm, Manufacturer Part Number=CDS-27204-L100, Material=Nylon, Max Current Rating=16A, Mount="Through Hole", Number of Circuits=2, Number of Contacts=2, Number of Levels=1, Number of Poles=2, Number of Positions=2, Number of Positions Per Level=2, Number of Rows=1, Orientation=Straight, Packaging=Bulk, Pitch=5mm, Pricing 1="1=3.55, 10=3.179, 25=2.8052, 50=2.5246, 100=2.4871, 250=2.3842, 500=2.2908, 1000=2.244 (USD)", Pricing 2="1=0.38, 10=0.368, 50=0.352, 100=0.3424, 250=0.32, 500=0.2944, 1000=0.272 (USD)", Radiation Hardening=No, Shape=Rectangular, Stock 1=445, Stock 2=16172, Supplier 1=Digi-Key, Supplier 2=Digi-Key, Supplier Part Number 2=277-1667-ND, Termination="Wire Leads", Voltage Rating=250V, Weight=0.067021oz, Width=20mm, Wire/Cable Gauge=14AWG, Wire Gauge (Max)=26AWG, Wire Gauge (Min)=12AWG
U1 U2 U3 U10: "IC LED DRIVER RGBA 28-TSSOP", Case/Package=TSSOP, Frequency=1MHz, High Level Output Current=10mA, Low Level Output Current=400A, Manufacturer="NXP Semiconductors", Manufacturer Part Number=PCA9685PW,118, Max Operating Temperature=85°C, Max Supply Voltage=5.5V, Min Operating Temperature=-40°C, Min Supply Voltage=2.3V, Nominal Supply Current=10A, Output Current per Channel=25mA, Package Quantity=2500, Power Dissipation=400W, Supplier Part Number 1=568-11925-1-ND, ComponentLink1Description=https://datasheet.ciiva.com/1947/pca9685-1947062.pdf, ComponentLink1URL=https://datasheet.ciiva.com/1947/pca9685-1947062.pdf, ComponentLink2Description=https://datasheet.ciiva.com/15134/getdatasheetpartid-103066-15134201.pdf, ComponentLink2URL=https://datasheet.ciiva.com/15134/getdatasheetpartid-103066-15134201.pdf, ComponentLink3Description=https://datasheet.ciiva.com/8125/pca9685-8125357.pdf, ComponentLink3URL=https://datasheet.ciiva.com/8125/pca9685-8125357.pdf, Lead Free="Lead Free", Mount="Surface Mount", Number of Outputs=16, Number of Pins=28, Output Voltage=5.5V, Packaging="Tape and Reel", Pricing 1="1=2.31, 10=2.074, 100=1.6674, 500=1.3699, 1000=1.1351 (USD)", Radiation Hardening=No, Stock 1=2599, Supplier 1=Digi-Key
U4 U6: "POWER MODULE, TO-PMOD-7, FULL REEL", Manufacturer="Texas Instruments", Manufacturer Part Number=LMZ12003TZ-ADJ/NOPB, Max Input Voltage=20V, Max Operating Temperature=125°C, Max Output Current=3A, Max Output Voltage=6V, Max Power Dissipation=18W, Min Input Voltage=4.5V, Min Operating Temperature=-40°C, Min Output Voltage=800mV, Package Quantity=1, Quiescent Current=1mA, Supplier Part Number 1=LMZ12003TZ-ADJ/NOPBCT-ND, Switching Frequency=1MHz, ComponentLink1Description=https://datasheet.ciiva.com/48695/001207013-da-01-en-ic-buc-lmz12003tz-adj-nopb-to-pmod-7-tid-48695238.pdf, ComponentLink1URL=https://datasheet.ciiva.com/48695/001207013-da-01-en-ic-buc-lmz12003tz-adj-nopb-to-pmod-7-tid-48695238.pdf, Efficiency=92%, Height=0.18inch, Lead Free="Lead Free", Length=0.4inch, Mount="Surface Mount", Number of Outputs=1, Number of Pins=8, Output Current=3A, Output Voltage=6V, Packaging="Tape and Reel", Pricing 1="1=9.05, 5=8.986, 10=8.918, 25=8.7804, 50=8.5062, 100=7.683 (USD)", REACH SVHC="No SVHC", Stock 1=0, Supplier 1=Digi-Key, Voltage - Output 1=6V, Width=0.54inch
U5 U7: "Voltage Detector, Active-Low, Push-Pull Reset, 2-Monitors, 1.5V-6.5Vin, SOT-23-6", Case/Package=SOT-23-6, Manufacturer="Texas Instruments", Manufacturer Part Number=TPS3779BDBVT, Max Operating Temperature=125°C, Max Supply Voltage=6.5V, Min Operating Temperature=-40°C, Min Supply Voltage=1.5V, Number of Voltages Monitored=2, Quiescent Current=2uA, Supplier Part Number 1=296-42165-1-ND, Threshold Voltage=1.194V, ComponentLink1Description=http://www.ti.com/general/docs/lit/getliterature.tsp?genericPartNumber=TPS3779&&fileType=pdf, ComponentLink1URL=http://www.ti.com/general/docs/lit/getliterature.tsp?genericPartNumber=TPS3779&&fileType=pdf, Lead Free="Lead Free", Number of Pins=6, Packaging="Tape and Reel", Pricing 1="1=1.82, 10=1.632, 100=1.312 (USD)", REACH SVHC="No SVHC", Reset="Active Low", Stock 1=495, Supplier 1=Digi-Key
U8 U9: "TRANSLATOR, VOLTAGE, 8BIT, 20TSSOP", Logic Case Style=TSSOP, Manufacturer="Texas Instruments", Manufacturer Part Number=TXS0108EPWR, Operating Temperature Max=85°C, Operating Temperature Min=-40°C, Output Current=620µA, Supplier Part Number 1=296-23011-1-ND, Supply Voltage Max=5.5V, Supply Voltage Min=1.2V, ComponentLink1Description=https://datasheet.ciiva.com/14287/txs0108e-14287280.pdf, ComponentLink1URL=https://datasheet.ciiva.com/14287/txs0108e-14287280.pdf, ComponentLink2Description=https://datasheet.ciiva.com/4834/sces642b-127094-4834401.pdf, ComponentLink2URL=https://datasheet.ciiva.com/4834/sces642b-127094-4834401.pdf, ComponentLink3Description=https://datasheet.ciiva.com/30509/txs0108epwr-30509699.pdf, ComponentLink3URL=https://datasheet.ciiva.com/30509/txs0108epwr-30509699.pdf, ComponentLink4Description=https://datasheet.ciiva.com/1899/txs0108e-1899604.pdf, ComponentLink4URL=https://datasheet.ciiva.com/1899/txs0108e-1899604.pdf, ComponentLink5Description=https://datasheet.ciiva.com/15096/getdatasheetpartid-322119-15096276.pdf, ComponentLink5URL=https://datasheet.ciiva.com/15096/getdatasheetpartid-322119-15096276.pdf, ComponentLink6Description=https://datasheet.ciiva.com/1899/txs0108e-1899605.pdf, ComponentLink6URL=https://datasheet.ciiva.com/1899/txs0108e-1899605.pdf, ComponentLink7Description=https://datasheet.ciiva.com/28653/1714661-28653429.pdf, ComponentLink7URL=https://datasheet.ciiva.com/28653/1714661-28653429.pdf, ComponentLink8Description=https://datasheet.ciiva.com/1899/txs0108e-1899606.pdf, ComponentLink8URL=https://datasheet.ciiva.com/1899/txs0108e-1899606.pdf, ComponentLink9Description=https://datasheet.ciiva.com/1508/1815244-1508732.pdf, ComponentLink9URL=https://datasheet.ciiva.com/1508/1815244-1508732.pdf, ComponentLink10Description=https://datasheet.ciiva.com/14287/txs0108e-14287532.pdf, ComponentLink10URL=https://datasheet.ciiva.com/14287/txs0108e-14287532.pdf, ComponentLink11Description=https://datasheet.ciiva.com/26039/txs0108e-26039599.pdf, ComponentLink11URL=https://datasheet.ciiva.com/26039/txs0108e-26039599.pdf, Logic Type="Voltage Level Translator", MSL="MSL 1 - Unlimited", No. of Inputs=8, No. of Pins=20, Packaging="Cut Tape", Pricing 1="1=1.7, 10=1.523, 100=1.2242, 500=1.0058, 1000=0.8334 (USD)", Propagation Delay=4.8ns, Stock 1=41812, Supplier 1=Digi-Key, SVHC="No SVHC (16-Jun-2014)"
U11: "Accelerometer and Gyroscope 14-Pin LGA T/R", Manufacturer=STMicroelectronics, Max Operating Temperature=85°C, Min Operating Temperature=-40°C, Supplier Part Number 1=497-16367-1-ND, ComponentLink1Description=http://www.st.com/content/ccc/resource/technical/document/datasheet/group0/38/96/79/af/ab/62/42/c3/DM00229854/files/DM00229854.pdf/jcr:content/translations/en.DM00229854.pdf, ComponentLink1URL=http://www.st.com/content/ccc/resource/technical/document/datasheet/group0/38/96/79/af/ab/62/42/c3/DM00229854/files/DM00229854.pdf/jcr:content/translations/en.DM00229854.pdf, Contact Plating=Nickel,Gold, Lead Free="Lead Free", Manufacturer Part Number=LSM6DS3HTR, Mount="Surface Mount", Packaging="Tape and Reel", Pricing 1="1=3.98, 10=3.572, 100=2.9264 (USD)", Stock 1=31997, Supplier 1=Digi-Key
U12: "IC ADC 16BIT 100KSPS DIFF 8MSOP", Case/Package=MSOP, Input Capacitance=30pF, Manufacturer="Analog Devices", Manufacturer Part Number=AD7684BRMZRL7, Max Input Voltage=5.5V, Max Operating Temperature=85°C, Max Power Dissipation=6mW, Min Input Voltage=500mV, Min Operating Temperature=-40°C, Min Supply Voltage=2.7V, Package Quantity=1000, Power Consumption=4mW, Supply Voltage=5V, ComponentLink1Description=https://datasheet.ciiva.com/16322/ad7684-278579-16322642.pdf, ComponentLink1URL=https://datasheet.ciiva.com/16322/ad7684-278579-16322642.pdf, ComponentLink2Description=https://datasheet.ciiva.com/8195/ad7684-8195814.pdf, ComponentLink2URL=https://datasheet.ciiva.com/8195/ad7684-8195814.pdf, ComponentLink3Description=https://datasheet.ciiva.com/1287/ad7684-1287305.pdf, ComponentLink3URL=https://datasheet.ciiva.com/1287/ad7684-1287305.pdf, ComponentLink4Description=https://datasheet.ciiva.com/16612/ad7684-16612158.pdf, ComponentLink4URL=https://datasheet.ciiva.com/16612/ad7684-16612158.pdf, Contact Plating=Gold, Full Scale Error=15LSB, Height=0.85mm, Integral Nonlinearity (INL)=3LSB, Interface=SPI, Lead Free="Contains Lead", Length=3mm, Max Supply Voltage=5.5V, Number of A/D Converters=1, Number of Analog Inputs=1, Number of Bits=16, Number of Channels=1, Number of Converters=1, Number of Elements=1, Number of Inputs=1, Number of Pins=8, Packaging="Tape and Reel", Polarity=Bipolar, Power Dissipation=6mW, Pricing 1="1=14.81, 10=13.613, 100=11.4968 (USD)", Resolution=16b, Sampling Rate=100KS/s, Signal to Noise Ratio (SNR)=91dB, Stock 1=2500, Supplier 1=Digi-Key, Supplier Part Number 1=AD7684BRMZRL7CT-ND, Supply Type=Single, Width=3mm
U13: "SP Amp Differential ADC Driver Single ±5.5V/11V 8-Pin SOIC N T/R", Case/Package=SOIC, Input Bias Current=7uA, Input Offset Voltage (Vos)=1mV, Input Resistance=6MR, Manufacturer="Analog Devices", Manufacturer Part Number=AD8138ARZ-R7, Max Dual Supply Voltage=5.5V, Max Operating Temperature=85°C, Max Power Dissipation=550mW, Max Supply Voltage=11V, Min Dual Supply Voltage=1.4V, Min Operating Temperature=-40°C, Min Supply Voltage=2.7V, Nominal Supply Current=20mA, Package Quantity=1000, Power Supply Rejection Ratio (PSRR)=70dB, Voltage Gain=0.028dB, -3db Bandwidth=320MHz, Bandwidth=320MHz, Common Mode Rejection Ratio=70dB, ComponentLink1Description=https://datasheet.ciiva.com/2975/ad8138-2975957.pdf, ComponentLink1URL=https://datasheet.ciiva.com/2975/ad8138-2975957.pdf, ComponentLink2Description=https://datasheet.ciiva.com/14848/ad8138-14848182.pdf, ComponentLink2URL=https://datasheet.ciiva.com/14848/ad8138-14848182.pdf, ComponentLink3Description=https://datasheet.ciiva.com/7615/ad8138-7615959.pdf, ComponentLink3URL=https://datasheet.ciiva.com/7615/ad8138-7615959.pdf, ComponentLink4Description=https://datasheet.ciiva.com/14848/ad8138-14848183.pdf, ComponentLink4URL=https://datasheet.ciiva.com/14848/ad8138-14848183.pdf, ComponentLink5Description=https://datasheet.ciiva.com/17371/ad8138-17371687.pdf, ComponentLink5URL=https://datasheet.ciiva.com/17371/ad8138-17371687.pdf, ComponentLink6Description=https://datasheet.ciiva.com/15128/getdatasheetpartid-86354-15128216.pdf, ComponentLink6URL=https://datasheet.ciiva.com/15128/getdatasheetpartid-86354-15128216.pdf, ComponentLink7Description=https://datasheet.ciiva.com/2975/ad8138-2975645.pdf, ComponentLink7URL=https://datasheet.ciiva.com/2975/ad8138-2975645.pdf, ComponentLink8Description=https://datasheet.ciiva.com/15382/ad8138-246651-15382031.pdf, ComponentLink8URL=https://datasheet.ciiva.com/15382/ad8138-246651-15382031.pdf, Gain Bandwidth Product=320MHz, Lead Free="Contains Lead", Mount="Surface Mount", Number of Channels=1, Number of Circuits=1, Number of Elements=1, Number of Pins=8, Operating Supply Current=20mA, Packaging="Tape and Reel", Power Dissipation=550mW, Pricing 1="1=9.26, 10=8.365, 100=6.9255, 500=6.0306 (USD)", Radiation Hardening=No, Slew Rate=1150V/µs, Stock 1=0, Supplier 1=Digi-Key, Supplier Part Number 1=AD8138ARZ-R7CT-ND

## Via types
v1: diameter 35, hole 20, Top Layer to Bottom Layer, 278 vias
v2: diameter 40, hole 20, Top Layer to Bottom Layer, 1 vias
v3: diameter 45, hole 25, Top Layer to Bottom Layer, 1 vias

## Nets (pads, with @x,y where several pads share a name; then routed paths per layer and width w, separated by ;. In a path a pad name is that pad's centre, name@x,y a point inside that pad or via, vN(x,y) a via of type N, cw(c..) or ccw(c..) an arc to the next point about the centre after c; other vN are vias at no path point)
1V8_POWER_GOOD: R48.1 U7.3 | length 148.4
  Top Layer w20: R48.1@3420,1290 3438.23,1271.77 U7.3@3560.9,1271.77
1V8_POWER_GOOD_R: D5.2 R48.2 | length 160.5
  Top Layer w20: D5.2@3170,1288.9 3328.9,1288.9 R48.2@3330,1290
1V8_PREFUSE: FUSE3.2 J3.35 | length 212
  Top Layer w25: v1(4830,3270) FUSE3.2@4903.07,3270
  Bottom Layer w25: J3.35@4692.91,3265.59 4697.32,3270 v1(4830,3270)
1V8_to_5V: 1V8_5V.1 U9.9 | length 241.8
  Top Layer w10: U9.9@4087.95,4339.53 4087.95,4292.05 4170,4210 4220,4210 1V8_5V.1@4240,4190
1V8BIAS: R120.2 R121.1 R122.2 R123.2 | length 412.6
  Top Layer w20: R121.1@4765.43,4140 4944.57,4140 4944.57,4045.43 4910,4010.87 R123.2@5000,4010.87
3V3: C7.1 C8.1 C14.2 C15.2 C16.2 C28.2 C40.2 C41.2 CAM7.15 R22.1 R24.2 R27.2 R42.2 R85.2 U4.7 U8.19 U11.5 U11.8 U11.12 | length 178.2
  Top Layer w10: U11.8@6959.69,2858.39 7051.61,2858.39 7065.55,2844.45 C41.2@7127.32,2844.45 C41.2@7127.32,2849.25
3V3_POWER_GOOD: R46.1 U7.2 | length 184.4
  Top Layer w20: R46.1@3410,1390 3440,1390 3520.83,1309.17 U7.2@3560.9,1309.17
3V3_POWER_GOOD_R: D4.2 R46.2 | length 392.2
  Top Layer w20: D4.2@3040,1288.9 3040,1360 3080,1400 R46.2@3344.57,1400
5V: C1.2 C2.2 C3.2 C4.2 C5.2 C6.2 C10.1 C11.1 C18.2 C19.2 C20.2 C21.2 C25.2 C32.2 C36.2 C37.2 C38.1 C39.2 C42.1 C45.2 C46.2 FAN4.1 R6.1 R13.1 R17.1 R25.1 R28.2 R37.2 R38.2 R70.2 SERVO4.2 U1.28 U2.28 U3.28 U5.1 U6.7 U7.1 U9.19 U10.28 U12.1 U12.8 U13.3 | length 3037.2
  Top Layer w10: C2.2@5225.35,5277.95 C2.2@5240,5292.6 ; C1.2@5322.6,5760 C1.2@5330,5752.6 ; C5.2@5352.6,4830 C5.2@5360,4822.6
  Top Layer w20: U7.1@3560.9,1346.57 C25.2@3560.9,1488.3
  Top Layer w30: v1(3450,1550) 3499.19,1550 C25.2@3560.9,1488.3 ; C11.1@7230,5240 7390,5240 7420,5270 R37.2@7554.57,5270
  Bottom Layer w35: v1(2000,2990) 2580,2990 3450,2120 v1(3450,1550)
5V_POWER_GOOD: R36.2 U5.3 | length 197.4
  Top Layer w20: R36.2@1554.43,5000 1629,5000 1684.2,5055.2 U5.3@1729,5055.2
5V_POWER_GOOD_R: D3.2 R36.1 | length 119.8
  Top Layer w20: D3.2@1367.9,4990 1377.9,5000 R36.1@1483.57,5000
5V_to_1V8: 5V_1V8.1 U9.12 | length 132.4
  Top Layer w10: U9.12@4087.95,4560 4087.95,4632.95 5V_1V8.1@4130,4675
12V_BATTIN: C9.1 C12.2 C13.2 C22.2 C23.2 C26.1 DPWR2.1 DPWR2.2 J3.36 J3.38 PWR2.1 R23.1 R26.2 R30.2 R31.1 R40.2 R41.1 R49.1 U4.1 U6.1 | length 6649.3
  Top Layer w20: R26.2@2080,5358.03 2261.97,5358.03 v1(2270,5350) ; v1(2620,4640) 2720,4640 2850,4510 2850,4110 v1(2790,4050)
  Bottom Layer w20: v1(2270,5350) 2270,4990 v1(2620,4640)
  Bottom Layer w50: v1(3200,3980) 3480,4260 4190,4260 4320,4130 4320,3470 4445.67,3344.33 J3.38@4531.5,3344.33 J3.36@4531.5,3265.59
  Bottom Layer w60: DPWR2.1@1800,1330 1800,2980 v3(2429.45,3609.45)
12V_POWER_GOOD: R35.2 U5.2 | length 190.1
  Top Layer w20: R35.2@1554.43,5130 1609,5130 1646.4,5092.6 U5.2@1729,5092.6
12V_POWER_GOOD_R: D2.2 R35.1 | length 115.7
  Top Layer w20: D2.2@1367.9,5130 R35.1@1483.57,5130
AMIC_BLOCK: C35.2 J5.7 MICBLK.1 R56.2 R123.1 | length 1226
  Top Layer w20: C35.2@4965.2,3820 4965.2,3865.2 5010,3910 R123.1@5010,3940 ; R123.1@5010,3946.54 R123.1@5010,3940 ; MICBLK.1@5070,3710 5170,3710 5200,3740 v1(5200,3940) R56.2@5089.13,3940 ; R56.2@5090,3939.13 R56.2@5089.13,3940 ; R123.1@5010,3940 R56.2@5089.13,3940
  Bottom Layer w20: J5.7@4703.74,3816.77 4946.77,3816.77 5070,3940 v1(5200,3940)
aud_diff_in_gnd: ainn.1 R80.2 R82.1 U13.1 | length 907.2
  Top Layer w20: U13.1@2497.78,4235 U13.1@2488.9,4235 2491.61,4232.28 2491.61,4120 2441.61,4070 2441.61,3925.43 2660.43,3925.43 ainn.1@2670,3935 ; U13.1@2509.76,4230.39 2584.76,4155.39 2688.17,4155.39 2713.6,4180.82 R82.1@2713.6,4269.96
aud_diff_in_sig: diffin.1 R72.2 R73.1 U13.8 | length 675.3
  Top Layer w20: diffin.1@2101.61,4140 2101.61,4284.57 2151.18,4235 U13.8@2274.33,4235 2274.33,4117.28 2341.61,4050 R72.2@2341.61,3925.43
audio_adc_in_n: adcn.1 R73.2 R78.1 U13.5 | length 924.9
  Top Layer w15: adcn.1@2095,4500 2101.61,4493.39 2101.61,4355.43 2131.18,4385 U13.5@2274.33,4385 2274.33,4432.72 2575.43,4733.82 R78.1@2694.57,4733.82
audio_adc_in_p: ainp.1 R79.1 R82.2 U13.4 | length 1293.9
  Top Layer w15: v1(2321.61,4570) 2605.43,4853.82 2694.57,4853.82 R79.1@2679.13,4838.39 ; v1(2460,4520) 2488.9,4491.1 U13.4@2488.9,4385 ; U13.4@2500.88,4380.39 2575.88,4455.39 2683.6,4455.39 2713.6,4425.39 ; ainp.1@2665,4540 2713.6,4491.4 2713.6,4425.39 ; R82.2@2713.6,4340.82 2713.6,4425.39
  Bottom Layer w15: v1(2321.61,4570) 2410,4570 v1(2460,4520)
AUDIO_BLOCK: audblk.1 C34.2 J5.6 R55.1 R120.1 | length 1097.4
  Top Layer w20: C34.2@4180,3740 v1(4400,3740) ; audblk.1@4395,3860 4400,3855 v1(4400,3740) ; R120.1@4910,3940 4900,3930 4900,3860 4780,3740 v1(4400,3740)
  Bottom Layer w20: v1(4400,3740) 4401.97,3738.03 J5.6@4520.67,3738.03
audio_in_blocked: audblkin.1 C44.2 R69.2 R71.2 R72.1 | length 924.5
  Top Layer w10: R72.1@2337.05,3850 R72.1@2341.61,3854.57
  Top Layer w20: R69.2@1920.87,4170 1920.87,4089.13 2000,4010 2150,4010 2240,3920 C44.2@2240,3850 ; R72.1@2337.05,3850 C44.2@2240,3850 ; audblkin.1@2410,3730 2394.57,3745.43 2240,3745.43 C44.2@2240,3850
AUDIOBIAS: C43.2 R69.1 R70.1 R75.2 | length 351.1
  Top Layer w20: C43.2@1620,4167.4 1737.4,4167.4 R75.2@1740,4170 ; R70.1@1740,4290 R75.2@1740,4170 ; R69.1@1850,4170 R75.2@1740,4170
B_LED_0: BLED.1 R94.1 U3.11 | length 4433.1
  Top Layer w10: v1(1895,5605) 1900,5600 2310,5600 2370,5540 2650,5540 2730,5460 3040,5460 3150,5350 3850,5350 4649.13,4550.87 U3.11@4903.78,4550.87
  Top Layer w15: v1(1160,6001.97) R94.1@1250,6001.97 ; R94.1@1250,6000 1310,6000 v1(1370,5940)
  Bottom Layer w15: v1(1160,6001.97) 1218.03,6001.97 1220,6000 BLED.1@1240,6020 ; v1(1370,5940) 1495.75,5940 1830.75,5605 v1(1895,5605)